# Altium PCB BE2022L-V10.PcbDoc
Units mil, origin at the board's own origin, x right, y up, seen from the top; angles counter-clockwise.
Board outline 787.4 x 866.14 mil, 2 copper layers (Top Layer, Bottom Layer), stack 39.335 mil thick; 37 components, 23 nets, 121 pads, 22 vias.
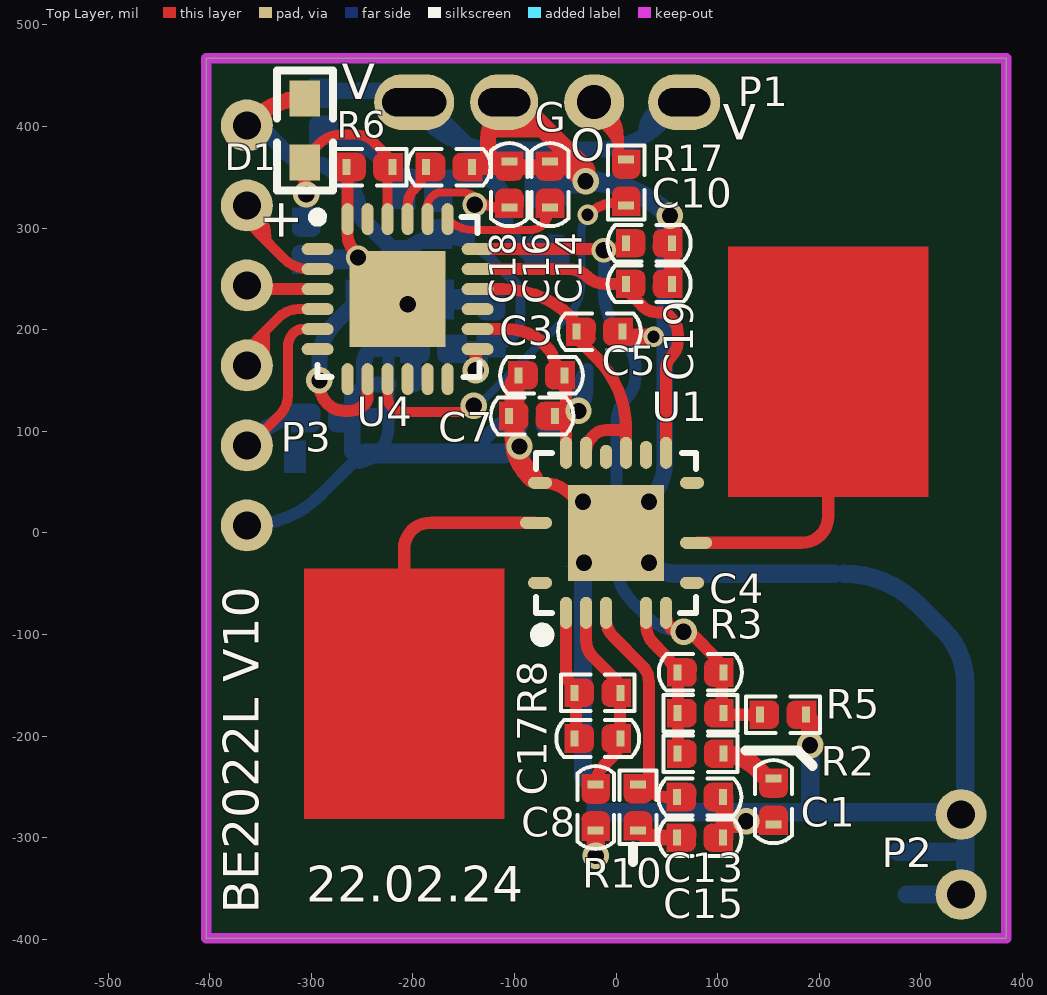
[diagram p0: Top Layer view]
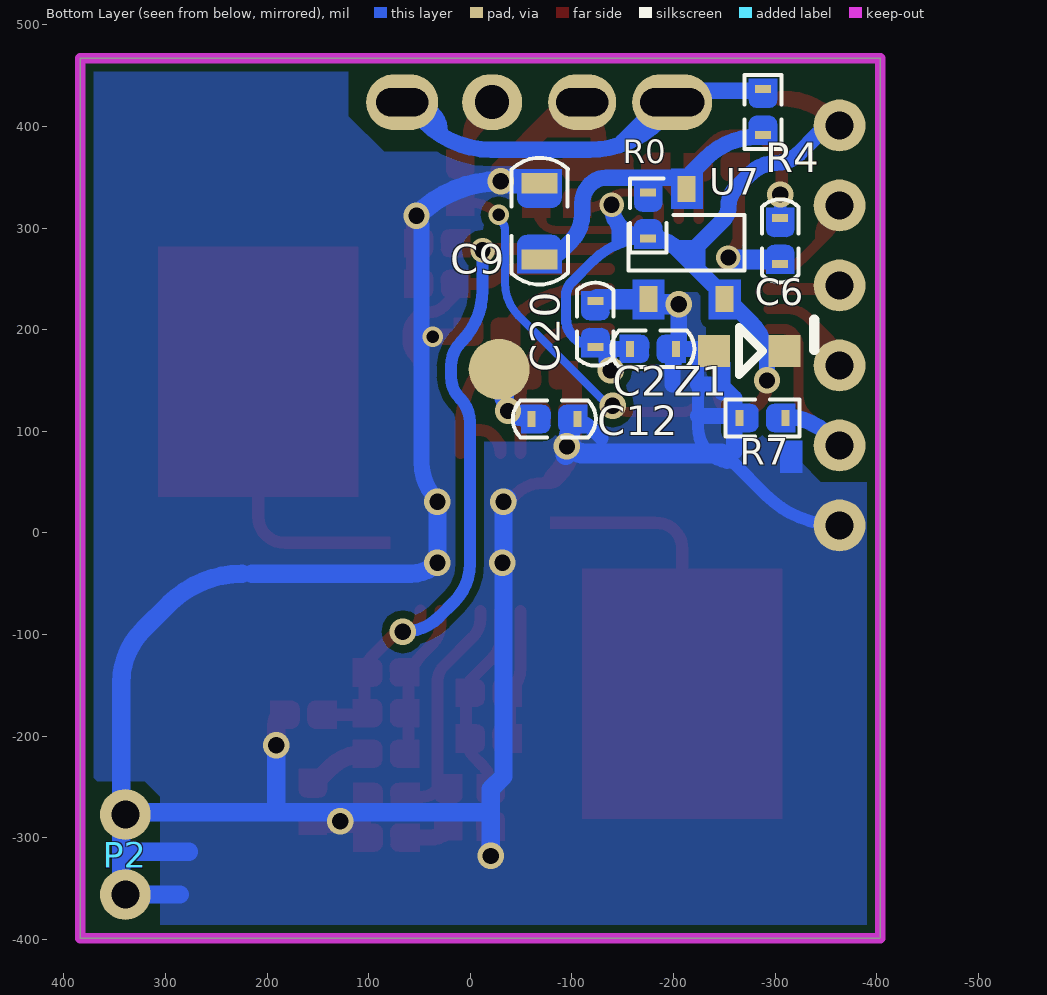
[diagram p1: Bottom Layer view, seen from below]

## Layer stack, top to bottom
Top Layer: signal copper 1.4
Dielectric: core 36.5354, FR-4, Dk 4.8
Bottom Layer: signal copper 1.4

## Board outline
-403.39,-399.02 -403.39,467.13 384.02,467.13 384.02,-399.02

## Design rules (kind name [scope] priority, off if disabled: settings)
Clearance [All] p1: gap=8
ComponentClearance [All] p1: gap=10 collisioncheckmode=3 verticalgap=10
PolygonConnect [All] p1: connectstyle=Direct reliefconductorwidth=10 reliefentries=4 polygonreliefangle="90 Angle"
RoutingVias [All] p1: holewidth=28 width=50 viastyle="Through Hole" minholewidth=28 minwidth=50 maxholewidth=28 maxwidth=50
SolderMaskExpansion [All] p1: expansion=4
TestPointUsage FabricationTestPointUsage [All] p1: valid=0 allowmultiple=FALSE
Testpoint FabricationTestpoint [(IsPad And (OnTopLayer Or OnBottomLayer))] p1: side=3 testpointundercomponent=TRUE minsize=40 maxsize=100 preferedsize=60 minholesize=0 maxholesize=40 preferedholesize=32 testpointgrid=1 style=297 order=0123456789
Width [All] p1: maxlimit=40 minlimit=6 preferedwidth=10 toplayer_prefwidth=6 bottomlayer_prefwidth=6 minimp=50.000000 maximp=50.000000 favimp=50.000000
18 further rules are at their usual default settings.

## Components (designator, comment, footprint, x,y, rotation, side; value= is the part's Value field where it differs from the comment)
C1 "10uF" C0402 155,-242.02 r270 top (schematic designator C2)
C2 "10uF" C0402 -157,181 r180 bottom
C3 "100nF" C0402 -96,155 r0 top (schematic designator C2)
C4 "1nF" C0402 105.61,-137.44 r180 top (schematic designator C2)
C5 "0.5pF" C0402 -39,198 r0 top (schematic designator C2)
C6 "100nF" C0402 -305,310 r270 bottom (schematic designator C2)
C7 "0.5pF" C0402 -60,115 r180 top (schematic designator C2)
C8 "10uF" C0402 -20,-293.02 r90 top (schematic designator C2)
C9 "10uF/16V" C0603 -68,270 r90 bottom (schematic designator C8)
C10 "33nF" C0402 10,285 r0 top (schematic designator C2)
C12 "10uF" C0402 -60,112 r180 bottom (schematic designator C2)
C13 "1uF" C0402 105.11,-260 r180 top (schematic designator C2)
C14 "1uF" C0402 -65,320 r90 top (schematic designator C2)
C15 "NC/33nF" C0402 105.11,-300 r180 top (schematic designator C2)
C16 "1uF" C0402 -105,320 r90 top (schematic designator C2)
C17 "33nF" C0402 4.61,-202.44 r180 top (schematic designator C2)
C18 "1uF" C0402 -187,360 r0 top (schematic designator C2)
C19 "0.5pF" C0402 10,245 r0 top (schematic designator C2)
C20 "100nF" C0402 -123,228 r270 bottom (schematic designator C2)
D1 "PT19-21C" LED-0603 -306.39,395.98 r90 top
P1 "PH2.0-4P" PH2.0-5P 76.93,423.82 r180 top (schematic designator P3)
P2 "SIP2.0-2P" SIP2.0-2P 339.61,-356.02 r90 bottom (schematic designator P1)
P3 "CON6" "CON 6PIN-1-2.0-DIP-P" -363.39,400.98 r270 top (schematic designator J1)
R0 "NC/0" R0402#1 -175,335 r270 bottom (schematic designator R5)
R2 "1K" R0402#2 105.61,-217.44 r180 top (schematic designator R4)
R3 "1M" R0402#2 105.61,-177.44 r180 top (schematic designator R4)
R4 "10" R0402#1 -288,437 r270 bottom (schematic designator R5)
R5 "47k" R0402#2 141.61,-179.02 r0 top (schematic designator R4)
R6 "47k" R0402#2 -220,360 r180 top (schematic designator R4)
R7 "10k" R0402#2 -310,113 r0 bottom (schematic designator R4)
R8 "10k" R0402#2 4.61,-157.44 r180 top (schematic designator R4)
R10 "NC/10k" R0402#2 21.61,-247.52 r270 top (schematic designator R4)
R17 "200" R0402#2 10,322 r90 top (schematic designator R4)
U1 "XBR816C" QFN24-1 0,0 r90 top
U4 "PHM320" QFN24 -215,230 r0 top (schematic designator U2)
U7 "ME6208A33M3G" SOT-23-L -175.39,230 r90 bottom (schematic designator U6)
Z1 "ESD5Z3V3" SOD-523 -240,179 r180 bottom

## Footprints (in the part's own frame and the unit in brackets; to place one, negate y for a bottom-side part, rotate by r counter-clockwise, add the part's x,y. Pads: shape width x height; smd on the part's side, far side on the other; paste and mask are expansions set on the pad)
C0402 [mm]
  rect 0.2x0.4 smd: 1(0,0) 2(1.15,0)
  Top Layer region: 0.873,0.352 0.873,-0.351 1.401,-0.351 1.401,0.352
  Top Layer region: -0.252,0.352 -0.252,-0.351 0.276,-0.355 0.354,-0.34 0.421,-0.295 0.465,-0.229 0.481,-0.151 0.477,-0.151 0.481,0.152 0.465,0.23 0.421,0.296 0.354,0.34 0.276,0.356 0.276,0.352
  Top Layer region: 1.402,-0.352 1.402,0.351 0.874,0.355 0.796,0.34 0.729,0.295 0.685,0.229 0.669,0.151 0.673,0.151 0.669,-0.152 0.685,-0.23 0.729,-0.296 0.796,-0.34 0.874,-0.356 0.874,-0.352
  silkscreen extent -0.46,-0.46 1.61,0.46
C0603 [mil]
  rect 19.8x35.55 smd mask+0: 1(-0.92,0) 2(74,0)
  Top Layer region: 59.72,-21.73 58.17,-21.61 56.67,-21.25 55.24,-20.66 53.92,-19.85 52.74,-18.84 51.73,-17.66 50.92,-16.34 50.33,-14.91 49.97,-13.4 49.85,-11.86 49.88,-11.86 49.85,11.88 49.97,13.43 50.33,14.93 50.92,16.36 51.73,17.68 52.74,18.86 53.92,19.87 55.24,20.68 56.67,21.27 58.17,21.63 59.72,21.75 59.72,21.72 87.79,21.72 87.79,-21.7
  Top Layer region: 13.34,-21.73 14.89,-21.61 16.39,-21.25 17.82,-20.66 19.14,-19.85 20.32,-18.84 21.33,-17.66 22.14,-16.34 22.73,-14.91 23.09,-13.4 23.21,-11.86 23.18,-11.86 23.21,11.88 23.09,13.43 22.73,14.93 22.14,16.36 21.33,17.68 20.32,18.86 19.14,19.87 17.82,20.68 16.39,21.27 14.89,21.63 13.34,21.75 13.34,21.72 -14.73,21.72 -14.73,-21.7
  silkscreen extent -25,-28 99,28
"CON 6PIN-1-2.0-DIP-P" [mm]
  round 1.3 hole 0.7: 1(0,0) 2(2,0) 3(4,0) 4(6,0) 5(8,0) 6(10,0)
LED-0603 [mm]
  rect 0.9x0.762 smd: 1(-0.8,0) 2(0.8,0)
  silkscreen extent -1.5,-0.7 1.5,0.7
PH2.0-5P [mm]
  oval 1.8x1.397 hole 0.7 slot 1.3 at 0 deg: 1(0.25,0)
  oval 1.5x1.397 hole 0.85: 2(2.5,0)
  oval 1.7x1.397 hole 0.7 slot 1.3 at 0 deg: 3(4.75,0)
  oval 2x1.397 hole 0.7 slot 1.6 at 0 deg: 4(7,0)
QFN24 [mm]
  oval 0.8x0.3 smd: 1(-2,1.25) 2(-2,0.75) 3(-2,0.25) 4(-2,-0.25) 5(-2,-0.75) 6(-2,-1.25) 13(2,-1.25) 14(2,-0.75) 15(2,-0.25) 16(2,0.25) 17(2,0.75) 18(2,1.25)
  oval 0.3x0.8 smd: 7(-1.25,-2) 8(-0.75,-2) 9(-0.25,-2) 10(0.25,-2) 11(0.75,-2) 12(1.25,-2) 19(1.25,2) 20(0.75,2) 21(0.25,2) 22(-0.25,2) 23(-0.75,2) 24(-1.25,2)
  rect 2.4x2.4 smd: 25(0,0)
  silkscreen extent -2.11,-1.95 2.05,2.16, body extent -2,-2 2,2, height 1
QFN24-1 [mm] "QFN24"
  oval 0.8x0.3 smd: 1(-2,1.25) 2(-2,0.75) 3(-2,0.25) 5(-2,-0.75) 6(-2,-1.25) 13(2,-1.25) 15(2,-0.25) 17(2,0.75) 18(2,1.25)
  oval 0.3x0.6 smd: 7(-1.25,-1.9) 12(1.25,-1.9) 19(1.25,1.9) 24(-1.25,1.9)
  oval 0.3x0.8 smd: 9(-0.25,-2) 21(0.25,2)
  oval 0.698x0.3 smd: 14(1.949,-0.75)
  oval 0.6x0.3 smd: 16(1.9,0.25)
  rect 2.4x2.4 smd: 25(0,0)
  silkscreen extent -2.7,-2 2,2, body extent -2.01,-2 2,2, height 1
R0402#1 [mm]
  rect 0.2x0.4 smd: 1(0,0) 2(1.15,0)
  Top Layer region: 1.401,0.352 1.401,-0.351 0.873,-0.351 0.873,0.352
  Top Layer region: -0.252,0.352 -0.252,-0.351 0.276,-0.351 0.353,-0.336 0.418,-0.292 0.461,-0.227 0.477,-0.151 0.477,-0.151 0.477,0.152 0.461,0.228 0.418,0.293 0.353,0.337 0.276,0.352 0.276,0.352
  Top Layer region: 1.402,-0.352 1.402,0.351 0.874,0.351 0.797,0.336 0.732,0.292 0.689,0.227 0.673,0.151 0.673,0.151 0.673,-0.152 0.689,-0.228 0.732,-0.293 0.797,-0.337 0.874,-0.352 0.874,-0.352
  silkscreen extent -0.35,-0.46 1.5,0.46, body extent 0.12,-0.26 1.12,0.24, height 0.35
R0402#2 [mm]
  rect 0.2x0.4 smd: 1(0,0) 2(1.15,0)
  Top Layer region: 1.402,-0.352 1.402,0.351 0.874,0.351 0.797,0.336 0.732,0.292 0.689,0.227 0.673,0.151 0.673,0.151 0.673,-0.152 0.689,-0.228 0.732,-0.293 0.797,-0.337 0.874,-0.352 0.874,-0.352
  Top Layer region: -0.252,0.352 -0.252,-0.351 0.276,-0.351 0.353,-0.336 0.418,-0.292 0.461,-0.227 0.477,-0.151 0.477,-0.151 0.477,0.152 0.461,0.228 0.418,0.293 0.353,0.337 0.276,0.352 0.276,0.352
  silkscreen extent -0.35,-0.46 1.5,0.46
SIP2.0-2P [mm]
  round 1.27 hole 0.7: 1(0,0) 2(2,0)
SOD-523 [mm]
  rect 0.8x0.8 smd: A(0,0) K(1.76,0)
  silkscreen extent 0.62,-0.6 2.5,0.79, body extent -0.47,-0.63 2.23,0.62, height 1.1
SOT-23-L [mm]
  rect 0.65x0.45 smd: 1(0,0) 2(0,-1.9) 3(2.757,-0.95)
  Top Layer region: -0.506,0.401 0.497,0.401 0.497,-0.402 -0.506,-0.402
  Top Layer region: -0.506,-1.504 0.497,-1.504 0.497,-2.307 -0.506,-2.307
  Top Layer region: 2.258,-0.561 3.261,-0.561 3.261,-1.365 2.258,-1.365
  silkscreen extent 0.71,-2.4 2.11,0.5, body extent 0.17,-2.44 2.67,0.56, height 1.05

## Part data
C1 C2 C3 C4 C5 C6 C7 C8 C9 C10 C12 C13 C14 C15 C16 C17 C18 C19 C20: library part Cap, "Capacitor"
D1: library part "Photo Sen", "Photosensitive Diode"
P1: library part CON5, "Connector"
P2: library part "Header 2", "Header, 2-Pin"
P3: "Connector"
R0 R2 R3 R4 R5 R6 R7 R8 R10 R17: library part Res2, "Resistor"
U7: library part SSP6206
Z1: library part "D Zener", "Zener Diode"

## Free pads (board coordinates)
  round 60 smd far side: 0(-28.39,160.98)

## Via types
v1: diameter 26, hole 16, Top Layer to Bottom Layer, tented both sides, 17 vias
v2: diameter 24, hole 16, Top Layer to Bottom Layer, tented both sides, 3 vias
v3: diameter 20, hole 12, Top Layer to Bottom Layer, tented both sides, 2 vias

## Nets (pads, with @x,y where several pads share a name; then routed paths per layer and width w, separated by ;. In a path a pad name is that pad's centre, name@x,y a point inside that pad or via, vN(x,y) a via of type N, cw(c..) or ccw(c..) an arc to the next point about the centre after c; other vN are vias at no path point)
1.2V: C3.2 C7.1 C12.1 pad.0 U1.18 U4.14 | length 333.8
  Top Layer w12: U4.14@-124.34,200.47 U4.14 -107.35,200.47 cw(c-107.35,147.65) -70,185 cw(c-98.97,156.03) -58,156.03 cw(c-79.21,134.81) -49.21,134.81 U1.18
  Bottom Layer w12: -65,120 v1(-37,120) ; v1(-37,120) ccw(c-57.8,140.8) -28.39,140.8 pad.0 ccw(c-7.59,140.19) -37,140.19 v1(-37,120)
  Bottom Layer w16: C12.1 -56.31,112 ccw(c-56.31,139.31) v1(-37,120)
3.3V: C2.1 C16.1 C20.2 D1.2 P3.1 R0.2 U4.8 U4.13 U4.20 U7.2 Z1.K | length 1061.2
  Top Layer w8: U4.20@-185.48,321.61 cw(c-173.61,321.61) -182,330 -180.54,331.46 cw(c-172,322.93) -172,335 -151.49,335 cw(c-151.49,314.51) v2@-137,329
  Top Layer w10: U4.20 U4.20@-185.48,321.61 ; v2@-137,329 ccw(c-115.27,350.73) -115.27,320 C16.1
  Top Layer w12: v1(-292,150) -292,146.31 ccw(c-264.69,146.31) -284,127 ccw(c-267.1,143.9) -267.1,120 -262.49,120 ccw(c-262.49,140.49) -248,126 ccw(c-256.38,134.38) -244.53,134.38 U4.8 ; v1@-138,162 U4.13@-138,176.59 ; U4.13@-138,176.59 cw(c-132.06,176.59) U4.13 ccw(c-132.06,176.59) U4.13@-138,176.59
  Top Layer w16: P3.1 -358.46,405.91 cw(c-306.39,353.84) D1.2
  Bottom Layer w10: R0.2@-174,289.72 cw(c-174,214.22) -120.61,267.61 -99.71,246.71 cw(c-113.49,232.93) -94,232.93 -94,211.31 cw(c-121.31,211.31) -102,192 cw(c-119.56,209.56) -119.56,184.72 C20.2@-125,184.72 ; -144,284 -144,295.93 cw(c-126.93,295.93) -139,308
  Bottom Layer w12: -138.86,174.84 cw(c-140.95,172.76) -138,172.76 v1@-138,162
  Bottom Layer w16: P3.1 cw(c-363.39,371.04) -342.21,392.21 -323.19,373.19 ccw(c-301,395.38) -301,364 cw(c-301,327.79) -275.39,353.39 -261.78,339.78 cw(c-280.56,321) -254,321 ccw(c-234.69,321) -248.34,307.34 -212,271 ; v1(-292,150) -292,168.93 cw(c-238.72,168.93) -276.39,206.61 -203.37,279.63 ; U7.2@-253.31,239.69 cw(c-250.19,236.57) U7.2@-250.19,240.98 ; -225.09,257.91 ccw(c-228.86,261.67) -223.53,261.67 -223.53,282.53 ; -221.38,280.38 -205.19,280.38 cw(c-205.19,277.81) -203.37,279.63 ; -183.16,293 ccw(c-183.16,298.89) -179,294.72 cw(c-177.85,293.58) -177.85,295.2 ; R0.2@-179,289.72 ccw(c-179,255.26) -203.37,279.63 ; R0.2 ccw(c-175,327.69) -148.16,300.84 ccw(c-170.26,322.95) v2(-139,323) ; -162,181 -133.99,181 ; v1@-138,162 ccw(c-147.68,171.68) -133.99,171.68 -133.99,181 ; C20.2@-125,184.72 cw(c-133.99,193.72) -133.99,181
  other v1: -138,160
4~16V: P1.1 P1.4 R4.1 | length 505.8
  Bottom Layer w16: R4.1@-288,435 -227.62,435 cw(c-227.62,396.83) P1.4@-200.63,423.82 ; P1.4@-208.26,423.82 P1.4@-200.63,423.82 ; P1.4@-203.48,425 cw(c-203.48,420.97) P1.4@-200.63,423.82 ; P1.4 ccw(c-186.21,423.82) -195.01,415.01 -185,405 ccw(c-117.36,472.64) -117.36,376.98 -20.57,376.98 ccw(c-20.57,469.17) 44.61,403.98 63.98,423.35 cw(c65.12,422.2) P1.1@65.12,423.82 ; P1.4@-180,420 ccw(c-167.93,420) -176.46,411.46 -150,385 ; 30,395 cw(c54.14,395) 37.07,412.07 P1.1@60,435 ; P1.1@41.46,421.46 cw(c50,412.93) P1.1@50,425
AD: C4.1 C10.1 R3.1 R5.1 U1.6 U4.18 | length 736.2
  Top Layer w12: U4.18 -3.97,279.21 ccw(c-3.97,298.97) C10.1 ; U1.6@49.21,-76.77 49.21,-81.82 ccw(c67.06,-81.82) v1@54.44,-94.44 ; v1(66.44,-97.44) cw(c66.44,-111.93) 76.68,-101.68 98.19,-123.19 cw(c83.94,-137.44) C4.1@104.09,-137.44 ; C4.1@103.44,-135.86 ccw(c105.67,-135.86) C4.1@104.09,-137.44 ; R3.1@104.09,-182.44 C4.1@104.09,-137.44 ; R3.1@104.09,-174 ccw(c106.51,-171.59) R3.1@106.51,-175 ; R3.1 ccw(c109.42,-173.64) 109.42,-179.02 R5.1
  Bottom Layer w12: v2@-12,280 -12,238.7 ccw(c59.7,238.7) 9,188 cw(c-15.14,163.86) 19,163.86 19,153.73 cw(c-11.73,153.73) 10,132 ccw(c33.08,108.92) 0.44,108.92 0.44,-30.44 ccw(c53.55,-30.44) 16,-68 30.59,-82.59 ccw(c66.44,-46.74) v1(66.44,-97.44)
  other v2: -12,278
GND: C1.2 C2.2 C3.1 C5.2 C6.2 C7.2 C8.1 C9.2 C10.2 C12.2 C13.1 C14.2 C15.1 C16.2 C18.2 C19.2 C20.1 P1.3 P2.1 P2.2 P3.6 R5.2 R6.2 R7.2 U1.19 U1.25 U4.24 U4.25 U7.1 Z1.A | length 3816.4
  Top Layer w11.8: U1.19 -72.07,49.21 cw(c-72.07,10.93) -45,38 -41.09,34.09 ccw(c-32.56,42.63) v1(-32.56,30.56)
  Top Layer w12: U4.25@-250,265 ccw(c-262.07,265) -253.54,273.54 -258,278 cw(c-242.99,293.01) -264.22,293.01 R6.2@-264.22,357.44 ; P1.3@-123.91,418.09 cw(c-110.08,404.26) P1.3 ; -80.22,400 ccw(c-80.22,408.22) -74.41,402.41 ; U1.19@-78.92,50.92 ccw(c-74.8,55.03) U1.19 ; R6.2@-264.22,357.44 ccw(c-267.83,357.44) R6.2 cw(c-267.83,357.44) R6.2@-264.22,357.44
  Top Layer w16: C18.2 -36.79,360 ccw(c-36.79,363.79) -34.11,361.11 ; -126,360 -126,386.13 cw(c-84.37,386.13) -113.81,415.56 ccw(c-120.06,421.82) P1.3@-111.22,421.82 ; P1.3@-123.91,418.09 P1.3@-102.83,397 ; -123,396 cw(c-120.57,393.57) -120.57,397 -70,397 ; U1.19@-82,54 U1.19@-78.92,50.92 ; C5.2 11.28,193 v3(37,193) ; C19.2 v1@55.28,306.51 ; v1@55.28,306.51 ccw(c47.51,306.51) v1(53,312) cw(c47.51,306.51) v1@55.28,306.51
  Top Layer w18: v1(-20,-318) C8.1@-20,-291.65 ; C15.1@106.65,-300 C13.1@106.65,-260 ; 106.65,-292 cw(c107.49,-292.84) 107.49,-291.65 ; 107.49,-286.65 C1.2@155,-286.65 ; R5.2 cw(c176.97,-188.94) 191,-188.94 v1(191,-209.02)
  Top Layer w20: P1.3@-111.22,406.22 P1.3@-111.22,421.82 ; P1.3@-104.61,410.61 cw(c-91.39,423.82) P1.3 cw(c-110.08,389.39) P1.3@-85.74,413.74 ; C3.1 cw(c-105.42,155) -98.76,148.34 ccw(c-95.76,145.34) -100,145.34 -100,94.31 ccw(c-46.13,94.31) -84.22,56.22 U1.19@-82,54 ; P1.3@-85.74,412.74 -30,357 v1(-30,346) -44,360
  Top Layer w24: P1.3@-112.05,423.82 ccw(c-109.21,423.82) P1.3@-111.22,421.82
  Bottom Layer w10: v1@-34.2,32.2 v1(-32.56,30.56)
  Bottom Layer w12: P3.6 ccw(c-363.39,110.3) -290.55,37.45 -259.36,68.64 -257.59,68.64 ccw(c-257.59,100.59) -235,78 ccw(c-261.56,104.56) -224,104.56 -224,181 ; C6.2 cw(c-289.85,249.57) -289.85,271
  Bottom Layer w14: -129,93 -118.21,103.79 cw(c-104.11,89.7) C12.2@-104.11,109.63
  Bottom Layer w16: -260,80 ccw(c-260.67,80.67) -259.72,80.67 -259.72,115 ; -248,138.26 -248,165.85 cw(c-226.57,165.85) -241.72,181 -207.28,181 ; -248,144.26 -259.72,132.53 -259.72,115 ; -248,146 -224,146 ; -224,115 -259.72,115 ; v1(-205,225) -205,186.49 cw(c-212.77,186.49) -207.28,181 ; -199,146 -199,161.02 ccw(c-227.25,161.02) -207.28,181 ; -187.46,225 ccw(c-187.46,242.07) U7.1 ; v1@32.44,32 ccw(c-5.12,69.56) 48,69.56 48,299.93 cw(c65.07,299.93) v1(53,312)
  Bottom Layer w18: v1(-32.56,30.56) -32.56,-239.84 -20,-252.4 v1(-20,-318) ; -10,-275 P2.2@343.63,-275 ; v1@32.44,32 v1(32.44,-29.44) ccw(c58.69,-3.19) 58.69,-40.31 214.82,-40.32 ; 191,-275 v1@191,-215 ; 224.82,-40.31 cw(c224.82,-141.94) 296.68,-70.08 322.01,-95.41 cw(c269.81,-147.61) 343.63,-147.61 343.63,-356.02 285.99,-356.02 ; 277.03,-314.02 343.63,-314.02
  Bottom Layer w20: -294,269 v2@-254,269 ; -247,78 -111.9,78 ccw(c-111.9,92.24) -101.83,82.17 cw(c-95,75.34) v1(-95,85) ; v1(-205,225) -187.46,225 ; U7.1 C20.1@-125,230 ; C12.2@-104.11,109.63 cw(c-131.08,87.19) v1@-96,87.19 ; v1@-95,87.19 v1(-95,85) ; v1@-93.86,76.86 v1(-95,85) ; v1(-30,346) -29.08,346 cw(c-29.08,229.92) v1(53,312) ; C9.2@-60,344 cw(c-55.17,339.17) -55.17,346 ccw(c-55.17,339.17) C9.2@-60,344
  Bottom Layer w22: v1@-34.56,32.56 v1@-34.2,32.2
  Bottom Layer w24: P1.3@-112.05,423.82 ccw(c-101.97,423.82) P1.3@-109.1,416.69 ; C9.2@-55.17,346 v1(-30,346)
  other v1: 128,-284.02 -31.56,-29.44 32.44,30.56
  other v2: -254,271
LIGHT_CHECK: C6.1 D1.1 R6.1 U4.22 | length 224.8
  Top Layer w10: D1.1 cw(c-296.43,364.49) -303.47,371.53 -291.49,383.51 cw(c-271,363.03) -271,392 -255.9,392 cw(c-255.9,368.1) -239,385 -224.24,370.24 cw(c-234.49,360) R6.1 ccw(c-208.3,348.3) -224.85,348.3 U4.22 ; v1@-306.39,336.35 ccw(c-301.65,336.35) v1(-305,333) cw(c-301.65,336.35) v1@-306.39,336.35
  Top Layer w12: v1@-306.39,336.35 D1.1
  Bottom Layer w12: C6.1 v1(-305,333)
NetC1_1: C1.1 R2.1 | length 61.6
  Top Layer w18: R2.1@104.09,-217.44 cw(c104.09,-265.73) 138.24,-231.58 155,-248.35
NetC4_2: C4.2 R2.2 R3.2 U1.5 | length 150.4
  Top Layer w11.8: U1.5@29.53,-76.77 29.53,-90.34 ccw(c56.55,-90.34) 37.44,-109.44 47.03,-119.03 cw(c13.83,-152.24) 60.79,-152.24 R2.2@60.79,-217.44
NetC8_2: C8.2 C17.1 R8.1 U1.2 | length 191.3
  Top Layer w11.8: U1.2@-29.53,-76.77 -29.53,-105.62 ccw(c-5.74,-105.62) -22.56,-122.44 -1.81,-143.19 cw(c-16.06,-157.44) 4.09,-157.44 4.09,-202.44 cw(c-21.17,-202.44) -3.31,-220.31 -11.98,-228.98 ccw(c7.39,-248.35) C8.2@-20,-248.35
NetC9_1: C9.1 R0.1 R4.2 U7.3 | length 318.2
  Bottom Layer w16: R4.2@-283,389.72 cw(c-283,316.94) -231.54,368.41 -217.79,354.66 U7.3@-217.79,349.53 ; U7.3@-213,340 -214.44,341.44 cw(c-206.34,349.53) U7.3@-217.79,349.53 ; R0.1 -175,344.88 ; C9.1@-75.88,269.08 C9.1@-60,269.08 ; C9.1 cw(c-68,300.65) -90.33,278.33 -99,287 cw(c-72.44,313.56) -110,313.56 -110,323.69 ccw(c-137.31,323.69) -118,343 ccw(c-133.76,327.24) -133.76,349.53 U7.3@-217.79,349.53
NetC13_2: C13.2 R10.1 U1.3 | length 239.8
  Top Layer w11.8: U1.3@-9.84,-76.77 -9.84,-84.86 ccw(c15.03,-84.86) -2.56,-102.44 25.37,-130.37 cw(c8.3,-147.44) 32.44,-147.44 32.44,-215.37 32.44,-218.31 32.44,-240.96 32.44,-249.88 ccw(c38.61,-249.88) 34.25,-254.25 ; R10.1@20,-248.35 cw(c20,-268.5) 34.25,-254.25 ; C13.2@63.35,-260 48.13,-260 cw(c48.13,-240.36) 34.25,-254.25
NetC14_1: C14.1 U4.19 | length 134.8
  Top Layer w8: U4.19 ccw(c-139.86,334.67) -139.86,298 -85.07,298 ccw(c-85.07,317.49) -71.29,303.71 ; -71.29,303.71 ccw(c-86.49,318.9) -65,318.9 C14.1 ccw(c-49.81,304.81) -71.29,304.81 -71.29,303.71
NetC15_2: C15.2 R10.2 | length 45.6
  Top Layer w16: R10.2@20,-291.65 ccw(c40.15,-271.5) 40.15,-300 C15.2@63.35,-300
NetC17_2: C17.2 R8.2 U1.1 | length 128.3
  Top Layer w11.8: U1.1@-49.21,-76.77 -49.21,-133.3 ccw(c-15.07,-133.3) -39.21,-157.44 C17.2@-39.21,-202.44
NetC18_1: C18.1 U4.21 | length 58.5
  Top Layer w10: U4.21 -205.16,321.71 cw(c-180.71,321.71) -198,339 -195.49,341.51 ccw(c-215.97,362) C18.1@-187,362
NetR17_1: R17.1 U4.9 | length 385.3
  Top Layer w10: U4.9 -224.84,133.28 ccw(c-211.72,133.28) -221,124 ccw(c-208.93,136.07) -208.93,119 -154.49,119 ccw(c-154.49,139.49) v1(-140,125) ; v3(-28,313) cw(c0.97,284.03) 0.97,325 R17.1@10,325
  Bottom Layer w8: v1@-140,128 ccw(c-140,144.9) -128.05,132.95 -47.66,213.34 ccw(c-80.63,246.31) -34,246.31 -34,298.51 cw(c-23.17,298.51) -30.83,306.17 ccw(c-37.66,313) v3(-28,313)
O: P1.2 R17.2 | length 155.1
  Top Layer w10: P1.2@-20,410 -5.49,395.49 cw(c-25.97,375) 3,375 ; P1.2@0,414 -1.56,415.56 ccw(c-21.5,395.63) P1.2 cw(c-21.5,407.7) -10.1,419.1 cw(c-41.72,387.48) 3,387.48 3,372.28 R17.2@10,365.28
  Top Layer w12: P1.2 cw(c-21.5,405.28) P1.2@-8.39,418.39
P1_0: P3.4 U4.4 | length 125.6
  Top Layer w10: P3.4 cw(c-325.12,164.76) -352.18,191.82 -332,212 cw(c-312.31,192.31) -312.31,220.16 U4.4 ; P3.4@-345.4,172 -345.4,198.6
P1_1: P3.5 R7.1 U4.5 | length 220.9
  Top Layer w10: P3.5 ccw(c-363.39,91.84) -359.27,87.73 -331,116 ccw(c-350.31,135.31) -323,135.31 -323,183 cw(c-303.69,183) -317.34,196.66 -317,197 cw(c-308.62,188.62) -308.62,200.47 U4.5
  Bottom Layer w16: P3.5 -355.2,94.2 cw(c-305,44) -305,115
P_V1: C19.1 U1.13 U4.17 | length 349
  Top Layer w11.8: U4.17 -46.17,259.53 cw(c-46.17,233.83) -28,252 ccw(c-11.1,268.9) -11.1,245 C19.1 ; 5,244 25.64,223.36 ccw(c41,238.73) 41,217 41.93,217 cw(c41.93,199.93) 54,212 cw(c37.1,195.1) 61,195.1 61,189.9 cw(c37.1,189.9) 54,173 ccw(c65.56,161.44) 49.21,161.44 U1.13
P_V2: C5.1 U1.15 U1.17 U4.16 | length 312.5
  Top Layer w11.8: U4.16 -111.29,239.84 cw(c-111.29,144.61) -43.95,211.95 cw(c-55.9,200) C5.1@-39,200 ; C5.1 ccw(c-24.51,198) -34.76,187.76 -19,172 cw(c-88.63,102.37) 9.84,102.37 ; U1.17 U1.17@-29.53,86.33 ; U1.17@-29.53,79.24 cw(c-7.24,79.24) -23,95 -21.95,96.05 cw(c-10,84.1) -10,101 9,101 ; U1.15 9.84,108.37
TCK: P3.2 U4.2 | length 132.5
  Top Layer w10: P3.2 ccw(c-325.1,322.24) -352.17,295.17 -327,270 ccw(c-301.72,295.28) -301.72,259.53 U4.2 ; P3.2@-354,315 cw(c-378.25,290.75) -343.96,290.75 -343.96,286.96
TMS: P3.3 U4.3 | length 70.6
  Top Layer w10: P3.3 ccw(c-354.55,252.34) P3.3@-354.55,239.84
  Top Layer w12: P3.3@-354.55,239.84 U4.3
pads on no net: U1.7 U1.9 U1.12 U1.14 U1.16 U1.21 U1.24 U4.1 U4.6 U4.7 U4.10 U4.11 U4.12 U4.15 U4.23

## Polygon pours and split planes (outlines as drawn)
GND on Bottom Layer "Bottom Layer-No Net" (solid, remove dead copper, pour order 1000): -403.39,50 -345,50 -325,70 -305,90 -305,333 -305,335 -250,390 -235,375 20,375 85,375 120,410 120,467.13 384.02,467.13 384.02,-244.45 320.55,-244.45 305,-260 305,-345 305,-399.02 -403.39,-399.02 -403.39,50

## Keep-outs
Keep-Out Layer:
  the board outline again, w10

## Other copper
Top Layer:
  region: -527.4,260.43
  region: -527.4,260.43
  region: 110.24,281.5 307.09,281.5 307.09,35.44 214.57,35.44 214.57,15.75 cw(c183.07,15.75) 183.07,-15.75 78.74,-15.75 78.74,-3.94 183.07,-3.94 ccw(c183.07,15.75) 202.76,15.75 202.76,35.44 110.24,35.44
  region: -110.24,-281.5 -307.09,-281.5 -307.09,-35.44 -214.57,-35.44 -214.57,-15.75 cw(c-183.07,-15.75) -183.07,15.75 -78.74,15.75 -78.74,3.94 -183.07,3.94 ccw(c-183.07,-15.75) -202.76,-15.75 -202.76,-35.44 -110.24,-35.44
Bottom Layer:
  rectangle net GND: -327,59 -305,90.99

## Silkscreen, mask and mechanical layers (free items; w line width, h text height)
Top Overlay:
  lines w10: 16.61,-324.02 16.61,-309.02 ; 127.28,-214.32 178.5,-214.32 193.5,-229.32
  text "V" at -270,415 h60
  text "G" at -80,385 h50
  text "V" at 105,375 h60
  text "O" at -45,355 h55
  text "BE2022L V10" at -340,-375 h60 r90
  text "22.02.24" at -305,-375 h60
Top Solder:
  rectangle: -320,-297.24 -100,-20
  region: 320,297.24 100,297.24 100,20 320,20
  lines w31.5: -208.81,-18.4 cw(c-180.46,-18.4) -180.46,9.95 ; -180,10 -125,10 ; 125,-10 180,-10 ; 180.46,-9.95 ccw(c180.46,18.4) 208.81,18.4

## Text inside footprints (layer, text, board x,y; h text height)
D1: Top Overlay "+" at -300,330 h66 r90